# Altium PCB PCB1.PcbDoc
Units mil, origin at the board's own origin, x right, y up, seen from the top; angles counter-clockwise.
Board outline 2660 x 2670 mil, 2 copper layers (Top Layer, Bottom Layer); 8 components, 16 nets, 76 pads, 0 vias.
Unrouted connection lines stored in the file: 3.
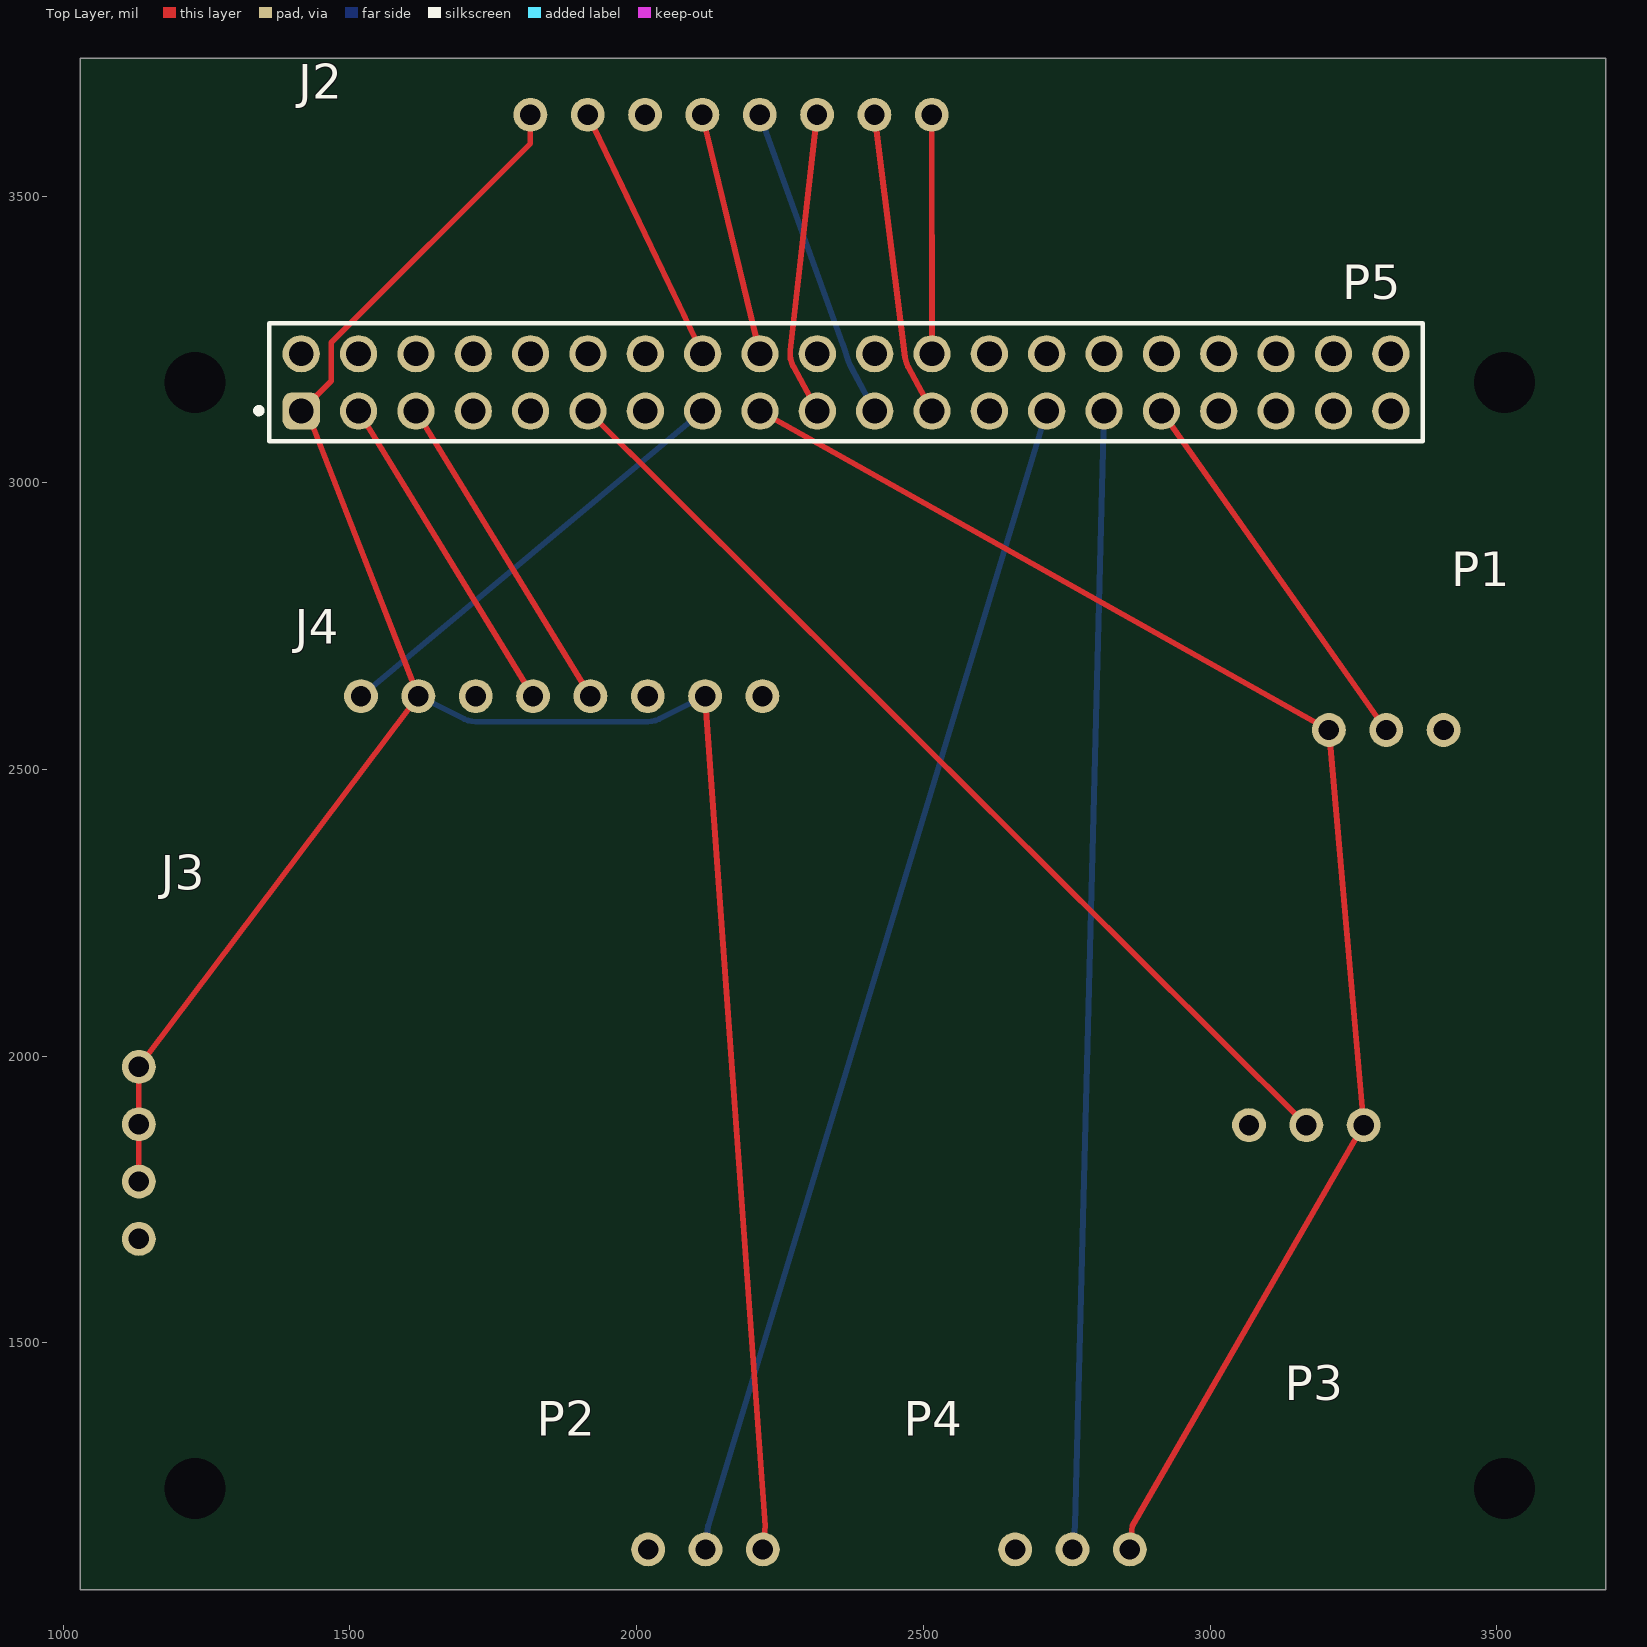
[diagram p0: Top Layer view]
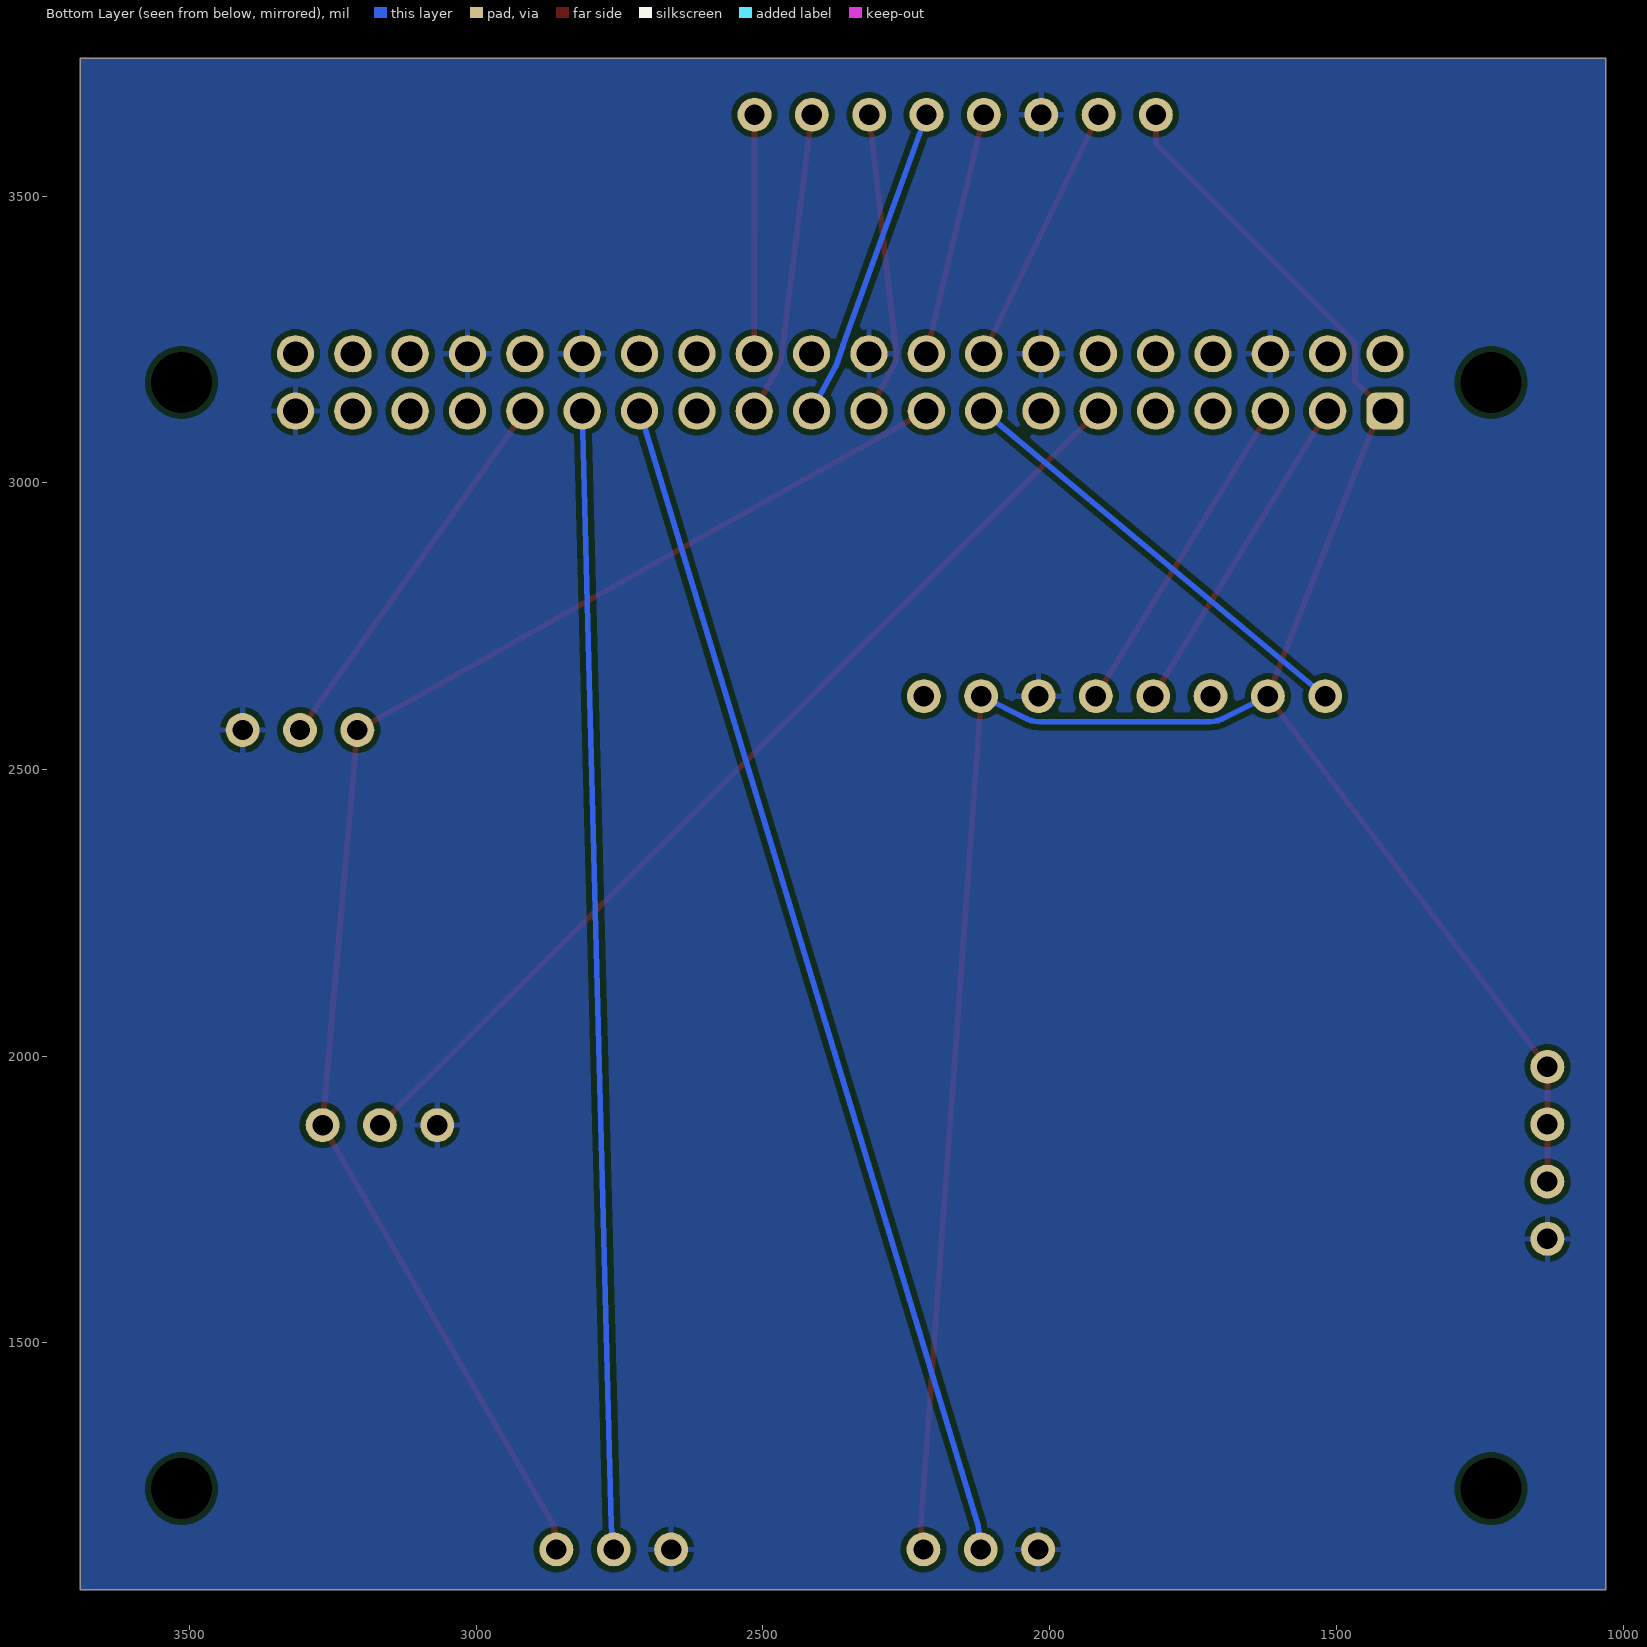
[diagram p1: Bottom Layer view, seen from below]

## Layer stack, top to bottom
Top Solder: solder mask 0.4, Solder Resist, Dk 3.5
Top Layer: signal copper 1.4
Dielectric 1: dielectric 12.6, FR-4, Dk 4.8
Bottom Layer: signal copper 1.4
Bottom Solder: solder mask 0.4, Solder Resist, Dk 3.5

## Board outline
1030,1070 3690,1070 3690,3740 1030,3740

## Design rules (kind name [scope] priority, off if disabled: settings)
Clearance [All] p1: gap=10 ignorepadtopadclearanceinfootprint=FALSE
Height [All] p1: minheight=0 maxheight=2500 prefheight=500
HoleSize [All] p1: absolutevalues=TRUE maxlimit=150 minlimit=1 maxpercent=80.000 minpercent=20.000
PolygonConnect [All] p1: connectstyle=Relief reliefconductorwidth=10 reliefentries=4 polygonreliefangle="90 Angle" airgapwidth=10
RoutingVias [All] p1: holewidth=28 width=50 viastyle="Through Hole" minholewidth=28 minwidth=50 maxholewidth=28 maxwidth=50
SolderMaskExpansion [All] p1: expansion=0 istentingtop=FALSE
Width [All] p1: maxlimit=39.37 minlimit=8 preferedwidth=10 minimp=50.000000 maximp=50.000000 favimp=50.000000
28 further rules are at their usual default settings.

## Components (designator, comment, footprint, x,y, rotation, side; value= is the part's Value field where it differs from the comment)
J2 "530470810" SPI -29985.43,3341.73 r180 top
J3 "Traffic light" "Traffic light" 1131.89,1681.5 r270 top
J4 "ENS160+AHT21" ENS160+AHT21 1919.29,2627.95 r180 top
P1 "BUZZER" BUZZER 1907.09,2568.9 r180 top
P2 "BUTTON" Button 2220,1140 r0 top
P3 "53047-0310" SR505 3267.72,1879.92 r0 top
P4 "BUTTON" Button2 2860,1140 r0 top
P5 "61304021121" 61304021121 2365,3175 r0 top locked

## Footprints (in the part's own frame and the unit in brackets; to place one, negate y for a bottom-side part, rotate by r counter-clockwise, add the part's x,y. Pads: shape width x height; smd on the part's side, far side on the other; paste and mask are expansions set on the pad)
61304021121 [mm] "Pin Header, pitch 2.54 mm, THT, Vertical, dual row, 40p"
  rrect50% 1.65x1.65 hole 1.1: 1(-24.13,-1.27)
  round 1.65 hole 1.1: 2(-24.13,1.27) 3(-21.59,-1.27) 4(-21.59,1.27) 5(-19.05,-1.27) 6(-19.05,1.27) 7(-16.51,-1.27) 8(-16.51,1.27) 9(-13.97,-1.27) 10(-13.97,1.27) 11(-11.43,-1.27) 12(-11.43,1.27) 13(-8.89,-1.27) 14(-8.89,1.27) 15(-6.35,-1.27) 16(-6.35,1.27) 17(-3.81,-1.27) 18(-3.81,1.27) 19(-1.27,-1.27) 20(-1.27,1.27) 21(1.27,-1.27) 22(1.27,1.27) 23(3.81,-1.27) 24(3.81,1.27) 25(6.35,-1.27) 26(6.35,1.27) 27(8.89,-1.27) 28(8.89,1.27) 29(11.43,-1.27) 30(11.43,1.27) 31(13.97,-1.27) 32(13.97,1.27) 33(16.51,-1.27) 34(16.51,1.27) 35(19.05,-1.27) 36(19.05,1.27) 37(21.59,-1.27) 38(21.59,1.27) 39(24.13,-1.27) 40(24.13,1.27)
  silkscreen extent -26.13,-2.62 25.55,2.62, body extent -25.48,-2.72 25.32,2.36, height 4.27
Button [mm]
  round 1.5 hole 0.9: 41(-5.08,0) 42(-2.54,0) 43(0,0)
  body extent -10.26,-4.23 5.24,4.27, height 17.86
Button2 [mm]
  round 1.5 hole 0.9: 44(-5.08,0) 45(-2.54,0) 46(0,0)
  body extent -10.26,-4.23 5.24,4.27, height 17.86
BUZZER [mm]
  round 1.5 hole 0.9: 1(-38.1,0) 2(-35.56,0) 3(-33.02,0)
  body extent -42.11,-5.37 -29.01,9.63, height 29.97
ENS160+AHT21 [mm]
  round 1.5 hole 0.9: 1(-7.62,0) 2(-5.08,0) 3(-2.54,0) 4(0,0) 5(2.54,0) 6(5.08,0) 7(7.62,0) 8(10.16,0)
  body extent -10.67,-1.55 13.33,17.75, height 2.44
SPI [mm]
  round 1.5 hole 0.9: 1(-825.5,-7.62) 2(-822.96,-7.62) 3(-820.42,-7.62) 4(-817.88,-7.62) 5(-815.34,-7.62) 6(-812.8,-7.62) 7(-810.26,-7.62) 8(-807.72,-7.62)
  body extent -836.44,-7.93 -796.99,0.22, height 59.2
SR505 [mm]
  round 1.5 hole 0.9: 1(-5.08,0) 2(-2.54,0) 3(0,0)
  body extent -8.27,-10.28 2.93,0.88, height 32.86
"Traffic light" [mm]
  round 1.5 hole 0.9: 1(-7.62,0) 2(-5.08,0) 3(-2.54,0) 4(0,0)
  body extent -14.65,-7.78 6.93,5.51, height 55.4

## Part data
J2 J4: Package=None, Availability=Unavailable, MP=530470810, Price=None
J3: "2.50mm Pitch SPOXâ„¢ Wire-to-Board Header, Vertical, Shrouded, 4 Circuits, Tin (Sn) Plating", Package=None, Check_prices=https://www.snapeda.com/parts/22035045/Molex/view-part/?ref=eda, MF=Molex, MP=22035045, SnapEDA_Link=https://www.snapeda.com/parts/22035045/Molex/view-part/?ref=snap
P1 P2 P3 P4: "Connector Header Through Hole 3 position 0.049 (1.25mm)", Package=None, Availability="In Stock", Check_prices=https://www.snapeda.com/parts/53047-0310/Molex/view-part/?ref=eda, MF=Molex, MP=53047-0310, Price=None, SnapEDA_Link=https://www.snapeda.com/parts/53047-0310/Molex/view-part/?ref=snap
P5: library part CMP-1502-01135-4, "WR-PHD Straight Male, PCB Header, Through Hole, 2 Rows, 40 Contacts, 2.54mm Pitch", Color=Black, Contact Resistance=20mΩ, Current Rating=3A, Max Operating Temperature=105°C, Min Operating Temperature=-40°C, Operating Supply Voltage=250V, Connector Type="Male Pin", Contact Material=Gold, Contact Mating Length=5.9944mm, Contact Plating=Gold, Gender=Male, Height=8.89mm, Lead Pitch=2.54mm, Mount="Through Hole", Number of Contacts=40, Number of Pins=40, Number of Positions=40, Number of Rows=2, Orientation=Vertical, Packaging=Bulk, Pitch=2.54mm, RoHS=Compliant, Row Spacing=2.54mm, Termination=Solder, Voltage Rating=250V

## Free pads (board coordinates)
  round 0 hole 106.3: 2(1230,1245.87) 2(1230,3175) 2(3513.46,1245.87) 2(3513.46,3175)

## Nets (pads, with @x,y where several pads share a name; then routed paths per layer and width w, separated by ;. In a path a pad name is that pad's centre, name@x,y a point inside that pad or via, vN(x,y) a via of type N, cw(c..) or ccw(c..) an arc to the next point about the centre after c; other vN are vias at no path point)
BUZZER(L/O): P1.2 P5.37 | length 680.4
  Top Layer w10: 2915,3125 P1.2
GND: J2.6 J3.4 J4.3 P1.1 P2.41 P3.1 P4.44 P5.6 P5.14 P5.20 P5.30 P5.34 P5.39
I2C(INT): J4.8 P5.15 | length 787.5
  Top Layer w10: J4.8 J4.8@1525.59,2637.8
  Bottom Layer w10: J4.8 P5.15
I2C(SCL): J4.4 P5.5 | length 582.8
  Top Layer w10: P5.5 J4.4
I2C(SDA): J4.5 P5.3 | length 582.8
  Top Layer w10: P5.3 J4.5
P2(S): P2.42 P5.27 | length 2073
  Bottom Layer w10: P2.42 2124.41,1181.1 P5.27
P3(OUT): P3.2 P5.18 | length 1766.2
  Top Layer w10: 1915,3125 P3.2
P4(S): P4.45 P5.29 | length 1985.9
  Bottom Layer w10: P4.45 2764.17,1181.1 P5.29
SPI(IRQ): J2.5 P5.11 | length 428.7
  Top Layer w10: J2.5 2215,3225
SPI(MISO): J2.4 P5.21 | length 555.1
  Bottom Layer w10: J2.4 2359.64,3241.17 cw(c2315,3225) 2360.09,3239.88 2369.91,3210.12 ccw(c2415,3225) 2373.21,3202.46 P5.21
SPI(MOSI): J2.3 P5.19 | length 530.9
  Top Layer w10: J2.3 2267.82,3230.36 ccw(c2315,3225) 2273.21,3202.46 P5.19
SPI(RST): J2.7 P5.16 | length 462.4
  Top Layer w10: J2.7 P5.16
SPI(SCK): J2.2 P5.23 | length 531.6
  Top Layer w10: J2.2 2467.89,3219.06 ccw(c2515,3225) 2473.21,3202.46 P5.23
SPI(SDA): J2.1 P5.24 | length 416.7
  Top Layer w10: J2.1 P5.24
VCC1: J2.8 J3.1 J3.2 J3.3 J4.2 J4.7 P2.43 P5.1 | length 4243.3
  Top Layer w10: J3.3 J3.2 J3.1 J4.7 1431.24,3108.76 P5.1 1467.52,3177.52 1467.52,3244.67 1814.57,3591.71 J2.8 ; J4.2 2224.41,1181.1 P2.43
  Bottom Layer w10: J4.7 1699.46,2588.08 ccw(c1719.29,2627.95) 1719.29,2583.43 2019.29,2583.43 ccw(c2019.29,2627.95) 2039.12,2588.08 J4.2
VCC2: P1.3 P3.3 P4.46 P5.17 | length 2677.2
  Top Layer w10: P5.17 P1.3 P3.3 2864.17,1181.1 P4.46
pads on no net: J4.1 J4.6 P5.2 P5.4 P5.7 P5.8 P5.9 P5.10 P5.12 P5.13 P5.22 P5.25 P5.26 P5.28 P5.31 P5.32 P5.33 P5.35 P5.36 P5.38 P5.40

## Polygon pours and split planes (outlines as drawn)
GND on Bottom Layer "GND_L02_P001" (solid, remove dead copper, pour order 1): 1030,3740 3690,3740 3690,1070 1030,1070

## Other copper
Top Layer:
  pour cut-out: 1230,3037.2 cw(c1230,3175) 1092.2,3175 cw(c1230,3175) 1230,3312.8 cw(c1230,3175) 1367.8,3175 cw(c1230,3175)
  pour cut-out: 3513.46,3037.2 cw(c3513.46,3175) 3375.67,3175 cw(c3513.46,3175) 3513.46,3312.8 cw(c3513.46,3175) 3651.26,3175 cw(c3513.46,3175)
  pour cut-out: 3513.46,1108.07 cw(c3513.46,1245.87) 3375.67,1245.87 cw(c3513.46,1245.87) 3513.46,1383.66 cw(c3513.46,1245.87) 3651.26,1245.87 cw(c3513.46,1245.87)
  pour cut-out: 1230,1108.07 cw(c1230,1245.87) 1092.2,1245.87 cw(c1230,1245.87) 1230,1383.66 cw(c1230,1245.87) 1367.8,1245.87 cw(c1230,1245.87)